# EAGLE board PentaFnord_CcsBoard_0_1 (EAGLE 5.11)
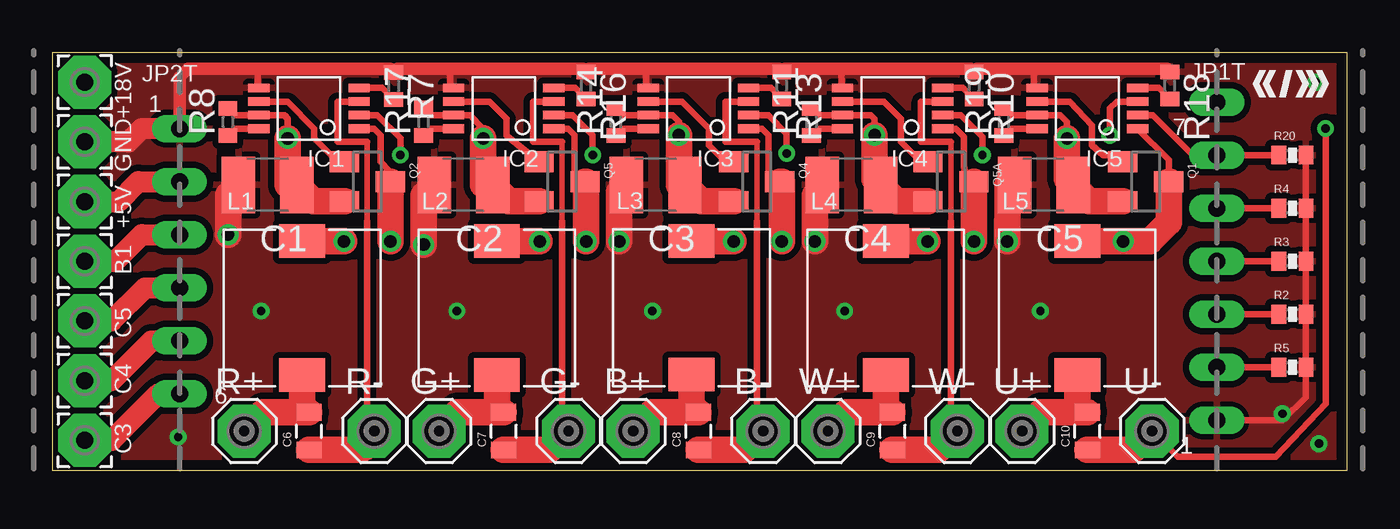
[diagram p0: board, top side]
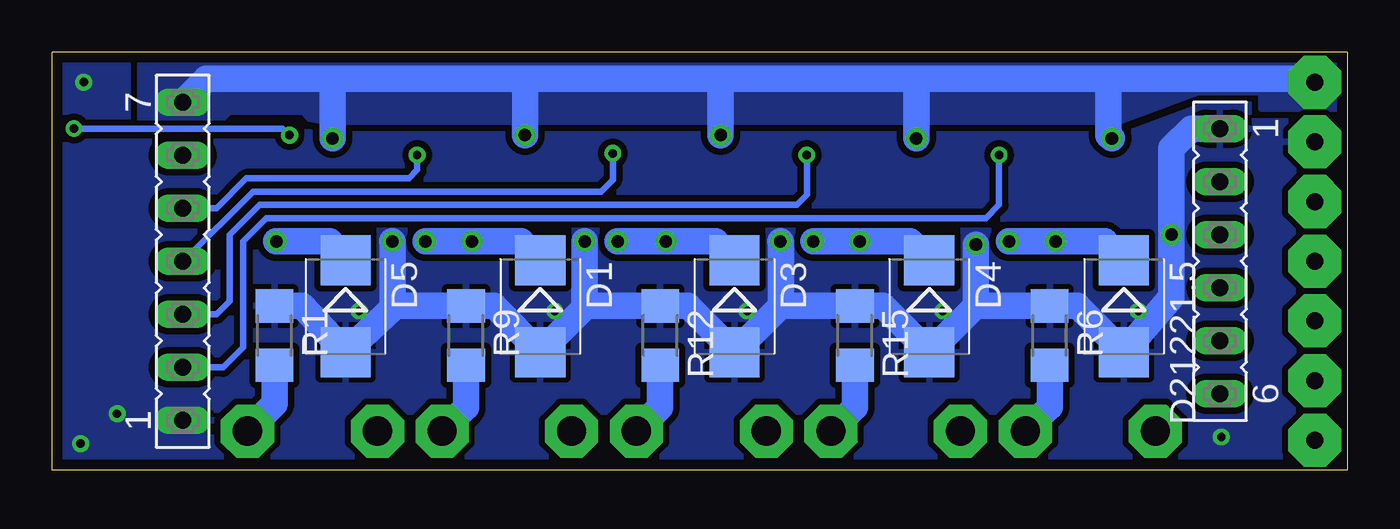
[diagram p1: board, bottom side, seen from below]

Size 62 x 20 mm. Coordinates in mm from the lower left corner, seen from the top.
Outline: 0,0 62,0 62,20 0,20 0,0
Copper layers (1*16): Top 0.035mm / dielectric 1.5mm / Bottom 0.035mm
Design rules "default *": minimum track width 10mil, minimum drill 0.4mm, track to track 10mil, track to pad 10mil, pad to pad 8mil, via to via 10mil, smd to smd 8mil, copper to edge 20mil, drill to drill 8mil, minimum pad ring 10mil, minimum via ring 8mil, stop-mask expansion 4mil, vias tented up to drill 40mil, thermal gap 10mil

## Footprints (pad centres in the part's own frame; a part is rotated, then mirrored left to right if it is on the bottom)
SE14 = drill 1.397 pad 2.54 octagon: MP 0,0
C1210 = smd 1.6 x 2.7: 1 -1.4,0; 2 1.4,0
0805 = smd 0.8 x 1.2: 1 -0.9,0; 2 0.9,0
SMB = smd 2.4 x 2.4: A 2.2,0; C -2.2,0
MSOP8 = smd 0.41 x 1.02: 1 -0.975,-2.4; 2 -0.325,-2.4; 3 0.325,-2.4; 4 0.975,-2.4; 5 0.975,2.4; 6 0.325,2.4; 7 -0.325,2.4; 8 -0.975,2.4
FE07 = drill 0.813 long: 1 -7.62,0; 2 -5.08,0; 3 -2.54,0; 4 0,0; 5 2.54,0; 6 5.08,0; 7 7.62,0
FE06 = drill 0.813 long: 1 -6.35,0; 2 -3.81,0; 3 -1.27,0; 4 1.27,0; 5 3.81,0; 6 6.35,0
PIS2816 = smd 2.2 x 1.6: P$1 0,3.2; P$2 0,-3.2
2,54/0,8 = drill 0.813 pad 2.54 octagon: 1 0,0
SOT23 = smd 1 x 1.4: 1 -0.95,-1.1; 2 0.95,-1.1; 3 0,1.1
R1206 = smd 1.6 x 1.803: 1 -1.422,0; 2 1.422,0
0402-RES = smd 0.7 x 0.9: 1 -0.65,0; 2 0.65,0
R0402 = smd 0.7 x 0.9: 1 -0.65,0; 2 0.65,0

## Placement (x,y rotation side)
B+  SE14  [SE14]  27.81,1.87 0 top
B-  SE14  [SE14]  34.04,1.87 0 top
C1  2.2µF / 50V  [C1210]  10.32,13.65 180 top
C2  2.2µF / 50V  [C1210]  19.68,13.65 180 top
C3  2.2µF / 50V  [C1210]  28.89,13.65 180 top
C4  2.2µF / 50V  [C1210]  38.26,13.65 180 top
C5  2.2µF / 50V  [C1210]  47.47,13.65 180 top
C6  1µF  [0805]  12.29,1.87 90 top
C7  1µF  [0805]  21.62,1.87 90 top
C8  1µF  [0805]  30.94,1.87 90 top
C9  1µF  [0805]  40.23,1.87 90 top
C10  1µF  [0805]  49.56,1.87 90 top
D1  MBRS140  [SMB]  38.63,7.84 270 bottom
D3  MBRS140  [SMB]  29.34,7.84 270 bottom
D4  MBRS140  [SMB]  20.02,7.84 270 bottom
D5  MBRS140  [SMB]  47.96,7.84 270 bottom
D21221.5  MBRS140  [SMB]  10.69,7.84 270 bottom
G+  SE14  [SE14]  18.52,1.87 0 top
G-  SE14  [SE14]  24.71,1.87 0 top
IC1  LM3401  [MSOP8]  12.29,17.32 90 top
IC2  LM3401  [MSOP8]  21.62,17.32 90 top
IC3  LM3401  [MSOP8]  30.94,17.32 90 top
IC4  LM3401  [MSOP8]  40.23,17.32 90 top
IC5  LM3401  [MSOP8]  49.56,17.32 90 top
JP1T  [FE07]  55.75,10 90 bottom
JP2T  [FE06]  6.1,10 270 bottom
L1  33µH / 1A  [PIS2816]  11.96,7.77 0 top
L2  33µH / 1A  [PIS2816]  21.29,7.77 0 top
L3  33µH / 1A  [PIS2816]  30.61,7.78 0 top
L4  33µH / 1A  [PIS2816]  39.9,7.77 0 top
L5  33µH / 1A  [PIS2816]  49.07,7.77 0 top
P+5T  WIREPAD2,54/0,8  [2,54/0,8]  1.56,12.86 0 top
P+18T  WIREPAD2,54/0,8  [2,54/0,8]  1.56,18.57 0 top
PB1T  WIREPAD2,54/0,8  [2,54/0,8]  1.56,10 0 top
PC3T  WIREPAD2,54/0,8  [2,54/0,8]  1.56,1.43 0 top
PC4T  WIREPAD2,54/0,8  [2,54/0,8]  1.56,4.29 0 top
PC5T  WIREPAD2,54/0,8  [2,54/0,8]  1.56,7.14 0 top
PGNDT1  WIREPAD2,54/0,8  [2,54/0,8]  1.56,15.72 0 top
Q1  MOSFET-PCHANNEL  [SOT23]  52.35,13.81 270 top
Q2  MOSFET-PCHANNEL  [SOT23]  15.09,13.81 270 top
Q4  MOSFET-PCHANNEL  [SOT23]  33.73,13.81 270 top
Q5  MOSFET-PCHANNEL  [SOT23]  24.41,13.81 270 top
Q5A  MOSFET-PCHANNEL  [SOT23]  43.03,13.81 270 top
R1  0R27  [R1206]  51.36,6.45 270 bottom
R2  100K  [0402-RES]  59.37,7.46 0 top
R3  100K  [0402-RES]  59.37,10 0 top
R4  100K  [0402-RES]  59.37,12.54 0 top
R5  100K  [0402-RES]  59.37,4.92 0 top
R6  0R27  [R1206]  14.25,6.45 270 bottom
R7  5.6k  [R0402]  16.35,18.38 270 top
R8  47k  [R0402]  8.41,16.67 90 top
R9  0R27  [R1206]  42.19,6.45 270 bottom
R10  5.6k  [R0402]  44.13,18.42 270 top
R11  47k  [R0402]  36.35,16.67 90 top
R12  0R27  [R1206]  32.89,6.45 270 bottom
R13  5.6k  [R0402]  34.92,18.42 270 top
R14  47k  [R0402]  26.99,16.67 90 top
R15  0R27  [R1206]  23.57,6.45 270 bottom
R16  5.6k  [R0402]  25.56,18.42 270 top
R17  47k  [R0402]  17.78,16.67 90 top
R18  5.6k  [R0402]  53.5,18.42 270 top
R19  47k  [R0402]  45.56,16.67 90 top
R20  100K  [0402-RES]  59.37,15.08 0 top
R+  SE14  [SE14]  9.19,1.87 0 top
R-  SE14  [SE14]  15.42,1.87 0 top
U+  SE14  [SE14]  46.43,1.87 0 top
U-  SE14  [SE14]  52.65,1.87 0 top
W+  SE14  [SE14]  37.13,1.87 0 top
W-  SE14  [SE14]  43.33,1.87 0 top

## Library data of the parts
B+ B- G+ G- R+ R- U+ U- W+ W- = solpad
C1-C5 R1 R6-R19 = rcl
C6-C10 Q1 Q2 Q4 Q5 Q5A R2-R5 R20 = SparkFun
D1 D3-D5 D21221.5 = diode
IC1-IC5 L1-L5 = seb
JP1T JP2T = con-lsta; OC_FARNELL: unknown; OC_NEWARK: unknown
P+5T P+18T PB1T PC3T PC4T PC5T PGNDT1 = wirepad

## Nets
+18V: C1.1 C2.1 C3.1 C4.1 C5.1 IC1.7 IC2.7 IC3.7 IC4.7 IC5.7 JP1T.7 P+18T.1 Q1.2 Q2.2 Q4.2 Q5.2 Q5A.2 R8.2 R11.2 R14.2 R17.2 R19.2
_VCC: JP2T.2 P+5T.1
B1: JP2T.3 PB1T.1
C3/ADC3: JP2T.6 PC3T.1
C4/ADC4/SDA: JP2T.5 PC4T.1
C5/ADC5/SCL: JP2T.4 PC5T.1
GND_T: C1.2 C2.2 C3.2 C4.2 C5.2 D1.A D3.A D4.A D5.A D21221.5.A IC1.5 IC2.5 IC3.5 IC4.5 IC5.5 JP1T.1 JP2T.1 PGNDT1.1 R1.1 R2.2 R3.2 R4.2 R5.2 R6.1 R7.1 R9.1 R10.1 R12.1 R13.1 R15.1 R16.1 R18.1 R20.2
N$1: C6.1 IC1.3 R6.2 R-.MP
N$2: C6.2 L1.P$2 R+.MP
N$3: D21221.5.C IC1.1 L1.P$1 Q2.3
N$4: C9.1 IC4.3 R9.2 W-.MP
N$5: IC1.4 R7.2
N$6: C9.2 L4.P$2 W+.MP
N$7: IC1.8 R8.1
N$8: D1.C IC4.1 L4.P$1 Q5A.3
N$9: IC4.4 R10.2
N$10: IC1.6 Q2.1
N$11: IC4.8 R11.1
N$12: IC4.6 Q5A.1
N$13: B-.MP C8.1 IC3.3 R12.2
N$14: B+.MP C8.2 L3.P$2
N$15: D3.C IC3.1 L3.P$1 Q4.3
N$16: IC3.4 R13.2
N$17: IC3.8 R14.1
N$18: C10.1 IC5.3 R1.2 U-.MP
N$19: C10.2 L5.P$2 U+.MP
N$20: IC3.6 Q4.1
N$21: C7.1 G-.MP IC2.3 R15.2
N$22: C7.2 G+.MP L2.P$2
N$23: D4.C IC2.1 L2.P$1 Q5.3
N$24: IC2.4 R16.2
N$25: IC2.8 R17.1
N$26: IC2.6 Q5.1
N$27: D5.C IC5.1 L5.P$1 Q1.3
N$28: IC5.4 R18.2
N$29: IC5.8 R19.1
N$30: IC5.6 Q1.1
T_B: IC3.2 JP1T.4 R3.1
T_G: IC2.2 JP1T.3 R2.1
T_R: IC1.2 JP1T.2 R5.1
T_U: IC5.2 JP1T.6 R20.1
T_W: IC4.2 JP1T.5 R4.1

## Tracks (layer width: path | path; a pad name or v marks a point on that pad's centre or on a via)
+18V  (via drill 0.6)
  Top 0.305: v11.27,15.88 11.27,16.83 11.12,16.98 IC1.7 8.74,16.99 R8.2 | R11.2 36.68,16.99 IC4.7 39.21,16.99 39.37,16.83 v39.37,16.03 | R14.2 27.32,16.99 IC3.7 29.69,16.99 30,16.67 v30,16.03 | R19.2 45.89,16.99 IC5.7 48.26,16.99 48.58,16.67 v48.58,15.88 | R17.2 18.11,16.99 IC2.7 20,16.99 20.64,16.35 v20.64,15.88
  Top 1.27: v11.27,15.88 11.27,13.65 C1.1 12.51,12.86 Q2.2 | v20.64,15.88 20.64,13.65 C2.1 21.88,12.86 Q5.2 | v30,16.03 30,13.65 C3.1 31.08,12.86 Q4.2 | v39.37,16.03 39.37,13.94 C4.1 40.45,12.86 Q5A.2 | v48.58,15.88 48.58,13.94 C5.1 49.66,12.86 Q1.2
  Bottom 1.27: P+18T.1 1.71,18.73 11.43,18.73 | 11.43,18.73 20.64,18.73 | 20.64,18.73 29.69,18.73 | v11.27,15.88 11.43,16.03 11.43,18.73 | 20.64,18.73 v20.64,15.88 | v30,16.03 30,18.42 29.69,18.73 | 29.69,18.73 39.37,18.73 | 39.37,18.73 48.58,18.73 | 39.37,18.73 v39.37,16.03 | 48.58,18.73 v48.58,15.88 | 48.58,18.73 54.64,18.73 JP1T.7
  pour Bottom (no thermals): 54.29,16.35 57.78,16.35 57.78,20.16 -0.32,20.16 -0.32,17.3 4.13,17.3 4.13,18.1 7.14,18.1 10.95,16.67 48.9,16.67 49.69,16.83 50.01,17.15 53.5,17.15
_VCC
  Top 1.016: JP2T.2 4.13,13.81 3.18,12.86 P+5T.1
B1
  Top 1.016: JP2T.3 4.29,11.27 3.02,10 PB1T.1
C3/ADC3
  Top 1.016: JP2T.6 5.08,3.65 2.86,1.43 PC3T.1
C4/ADC4/SDA
  Top 1.016: JP2T.5 4.76,6.19 2.86,4.29 PC4T.1
C5/ADC5/SCL
  Top 1.016: JP2T.4 4.44,8.73 2.86,7.14 PC5T.1
GND_T  (via drill 0.4, 0.6)
  Top 0.305: IC1.5 9.84,18.34 9.84,19.21 | IC2.5 19.05,18.46 19.05,19.21 | IC3.5 28.42,18.41 28.42,19.21 | IC4.5 37.78,18.34 37.78,19.21 | IC5.5 46.99,18.46 46.99,19.21 | JP1T.1 58.89,2.38 60.01,3.49 60.01,5.07 R5.2 R2.2 R3.2 R4.2 R20.2
  Top 0.61: JP2T.1 6.1,18.8 6.51,19.21 9.84,19.21 16.18,19.21 R7.1 16.53,19.21 19.05,19.21 25.42,19.21 R16.1 25.7,19.21 28.42,19.21 34.78,19.21 R13.1 35.07,19.21 37.78,19.21 43.99,19.21 R10.1 44.28,19.21 46.99,19.21 53.36,19.21 R18.1
  Top 1.016: JP2T.1 4.29,16.35 3.89,15.95 3.81,15.88 3.65,15.72 PGNDT1.1
  Top 1.27: C1.2 8.41,13.15 v8.41,11.27 | C3.2 27.15,13.31 v27.15,10.95 | C2.2 17.78,13.15 v17.78,10.8 | C4.2 36.51,13.15 v36.51,10.95 | v45.72,10.95 45.72,13.65 C5.2
  Bottom 1.27: JP2T.1 7.46,16.35 8.41,15.4 v8.41,11.27 8.41,8.28 D21221.5.A 12.92,7.87 R6.1 17.79,7.87 | JP1T.1 55.25,2.38 | R1.1 50.03,7.87 D5.A 45.69,7.75 | 17.79,7.87 D4.A 22.24,7.87 R15.1 27.11,7.87 | 27.11,7.87 D3.A 31.56,7.87 R12.1 36.41,7.87 | 36.41,7.87 36.51,7.87 v36.51,10.95 | 36.41,7.87 D1.A 40.86,7.87 R9.1 45.58,7.87 45.69,7.75 | v27.15,10.95 27.11,10.92 27.11,7.87 | v17.78,10.8 v17.79,10.79 17.79,7.87 | v45.72,10.95 45.69,10.93 45.69,7.75
  other vias: 10,7.62 6.03,1.59 19.37,7.62 28.73,7.62 37.94,7.62 47.31,7.62 60.64,1.27 58.9,2.7 60.48,18.57
  pour Bottom (isolate 0.305, rank 2): 0,20 62,20 62,0 0,0
  pour Top (isolate 0.305): 0,20 62,20 62,0 0,0
  pour Bottom (no thermals): 54.77,3.49 57.94,3.49 57.94,2.86 57.94,1.11 55.56,1.11 54.77,1.11
N$1
  Top 0.254: 15.08,11.91 15.08,15.72
  Top 0.305: 15.08,15.72 13.65,15.72 13.65,17.62 14.62,17.62 IC1.3 | 15.08,11.91 15.08,2.21 R-.MP
  Top 1.27: C6.1 14.52,0.97 arc90 R-.MP
  Bottom 1.27: R6.2 14.25,3.04 R-.MP
N$2
  Top 1.27: R+.MP 10.09,2.77 C6.2 arc-90 11.96,3.1 L1.P$2
N$3  (via drill 0.6)
  Top 0.305: IC1.1 14.7,16.35 15.4,16.35 15.72,16.03 15.72,14.76 16.19,14.29 Q2.3
  Top 1.27: Q2.3 v16.19,10.95 | v13.97,10.95 11.99,10.95 L1.P$1
  Bottom 1.27: v16.19,10.95 v13.97,10.95 11.61,10.95 D21221.5.C
N$4
  Top 0.254: 43.03,11.91 43.03,15.72
  Top 0.305: IC4.3 41.59,17.64 41.59,15.72 43.03,15.72 | 43.03,11.91 43.03,2.18 W-.MP
  Top 1.27: C9.1 42.43,0.97 W-.MP
  Bottom 1.27: R9.2 42.19,3.02 W-.MP
N$5
  Top 0.305: 16.21,17.77 R7.2 15.79,18.29 IC1.4
N$6
  Top 1.27: W+.MP 38.03,2.77 C9.2 arc-90 39.9,3.1 L4.P$2
N$7
  Top 0.305: IC1.8 8.74,16.34 R8.1
N$8  (via drill 0.6)
  Top 0.305: IC4.1 43.27,16.34 43.66,15.95 43.66,14.52 arc67 Q5A.3
  Top 1.27: Q5A.3 v44.13,10.95 | 40.23,10.95 L4.P$1 39.93,10.95 v41.91,10.95
  Bottom 1.27: v44.13,10.95 v41.91,10.95 39.55,10.95 D1.C
N$9
  Top 0.305: IC4.4 43.61,18.29 R10.2
N$10
  Top 0.305: Q2.1 13.65,14.76 12.54,15.88 12.54,16.35 11.27,17.62 9.83,17.62 IC1.6
N$11
  Top 0.305: IC4.8 36.68,16.34 R11.1
N$12
  Top 0.305: Q5A.1 41.59,14.76 40.64,15.72 40.64,16.83 39.83,17.64 IC4.6
N$13
  Top 0.254: 33.73,11.91 33.73,15.72
  Top 0.305: IC3.3 32.23,17.64 32.23,15.72 33.73,15.72 | 33.73,11.91 33.73,2.18 B-.MP
  Top 1.27: B-.MP 33.14,0.97 C8.1
  Bottom 1.27: R12.2 32.89,3.02 B-.MP
N$14
  Top 1.27: C8.2 | B+.MP 28.71,2.77 C8.2 | L3.P$2 30.61,3.1 arc90 C8.2
N$15  (via drill 0.6)
  Top 0.305: IC3.1 33.98,16.34 34.29,16.03 34.29,14.35 Q4.3
  Top 1.27: Q4.3 34.92,13.81 v34.92,10.95 | 30.94,10.95 L3.P$1 30.64,10.95 v32.62,10.95
  Bottom 1.27: v34.92,10.95 v32.62,10.95 30.25,10.95 D3.C
N$16
  Top 0.305: IC3.4 34.4,18.29 R13.2
N$17
  Top 0.305: IC3.8 27.31,16.34 R14.1
N$18  (via drill 0.4)
  Top 0.305: IC5.3 50.96,17.64 50.64,17.32 v50.64,16.03 | 52.35,2.18 U-.MP 53.89,0.64 58.58,0.64 60.96,3.18 v60.96,16.35
  Top 1.27: C10.1 51.75,0.97 U-.MP
  Bottom 0.305: v50.64,16.03 50.96,16.35 v60.96,16.35
  Bottom 1.27: R1.2 51.36,3.17 U-.MP
N$19
  Top 1.27: U+.MP 47.33,2.77 C10.2 arc-90 49.07,3.26 L5.P$2
N$20
  Top 0.305: IC3.6 30.14,17.64 31.43,16.35 31.43,15.56 32.23,14.76 Q4.1
N$21
  Top 0.254: 24.41,11.91 24.41,15.72
  Top 0.305: IC2.3 23.02,17.64 23.02,15.72 24.41,15.72 | 24.41,11.91 24.41,2.18 G-.MP
  Top 1.27: C7.1 23.81,0.97 G-.MP
  Bottom 1.27: R15.2 23.57,3.02 G-.MP
N$22
  Top 1.27: G+.MP 19.42,2.77 C7.2 arc-90 21.29,3.1 L2.P$2
N$23  (via drill 0.6)
  Top 0.305: IC2.1 24.7,16.34 25,16.03 25,14.32 Q5.3
  Top 1.27: Q5.3 25.56,13.81 v25.56,10.95 | 21.61,10.95 L2.P$1 21.31,10.95 v23.34,10.95
  Bottom 1.27: v25.56,10.95 v23.34,10.95 20.93,10.95 D4.C
N$24
  Top 0.305: IC2.4 25.03,18.29 R16.2
N$25
  Top 0.305: IC2.8 18.1,16.34 R17.1
N$26
  Top 0.305: IC2.6 20.93,17.64 21.75,16.83 21.75,16 Q5.1
N$27  (via drill 0.6)
  Top 0.305: IC5.1 53.45,14.85 Q1.3
  Top 1.27: 53.5,13.81 Q1.3 53.45,11.86 52.55,10.95 v51.28,10.95 49.09,10.95 L5.P$1 49.56,10.95
  Bottom 1.27: D5.C 48.71,10.95 v51.28,10.95
N$28
  Top 0.305: IC5.4 52.97,18.29 R18.2
N$29
  Top 0.305: IC5.8 45.88,16.34 R19.1
N$30
  Top 0.305: IC5.6 48.72,17.64 49.77,16.51 49.77,15.56 50.32,15.08 50.93,15.08 Q1.1
T_B  (via drill 0.4)
  Top 0.305: IC3.2 34.28,16.99 35.16,16.11 v35.16,15.16 | R3.1 JP1T.4
  Bottom 0.305: JP1T.4 55.72,10 52.39,13.34 35.72,13.34 35.16,13.89 v35.16,15.16
T_G  (via drill 0.4)
  Top 0.305: IC2.2 24.92,16.99 25.88,16.03 v25.88,15.08 | R2.1 JP1T.3
  Bottom 0.305: v25.88,15.08 25.88,13.18 26.35,12.7 52.07,12.7 53.5,11.27 53.5,8.1 54.14,7.46 JP1T.3
T_R  (via drill 0.4)
  Top 0.305: IC1.2 15.55,16.99 16.67,15.88 v16.67,15.08 | R5.1 JP1T.2
  Bottom 0.305: v16.67,15.08 16.67,12.7 17.3,12.07 51.75,12.07 52.86,10.95 52.86,5.87 53.82,4.92 JP1T.2
T_U
  Top 0.305: JP1T.6 54.77,15.08 | R20.1 JP1T.6 | IC5.2 52.7,16.99 54.61,15.08 JP1T.6
T_W  (via drill 0.4)
  Top 0.305: IC4.2 43.49,16.99 44.53,15.95 v44.53,15.08 | R4.1 JP1T.5
  Bottom 0.305: JP1T.5 54.14,12.54 52.7,13.97 44.93,13.97 44.53,14.37 v44.53,15.08

## Text on the board
tNames: 1 | +18V | 7 | GND | +5V | B1 | C5 | C4 | 6 | 1 | C3
bStop: PowerLedBoard 0.1 | PentaFnord